# Altium PCB CartePuissance.PcbDoc
Units mm, origin at the board's own origin, x right, y up, seen from the top; angles counter-clockwise.
Board outline 48.93 x 45.85 mm, 2 copper layers (Top Layer, Bottom Layer); 22 components, 10 nets, 48 pads, 0 vias.
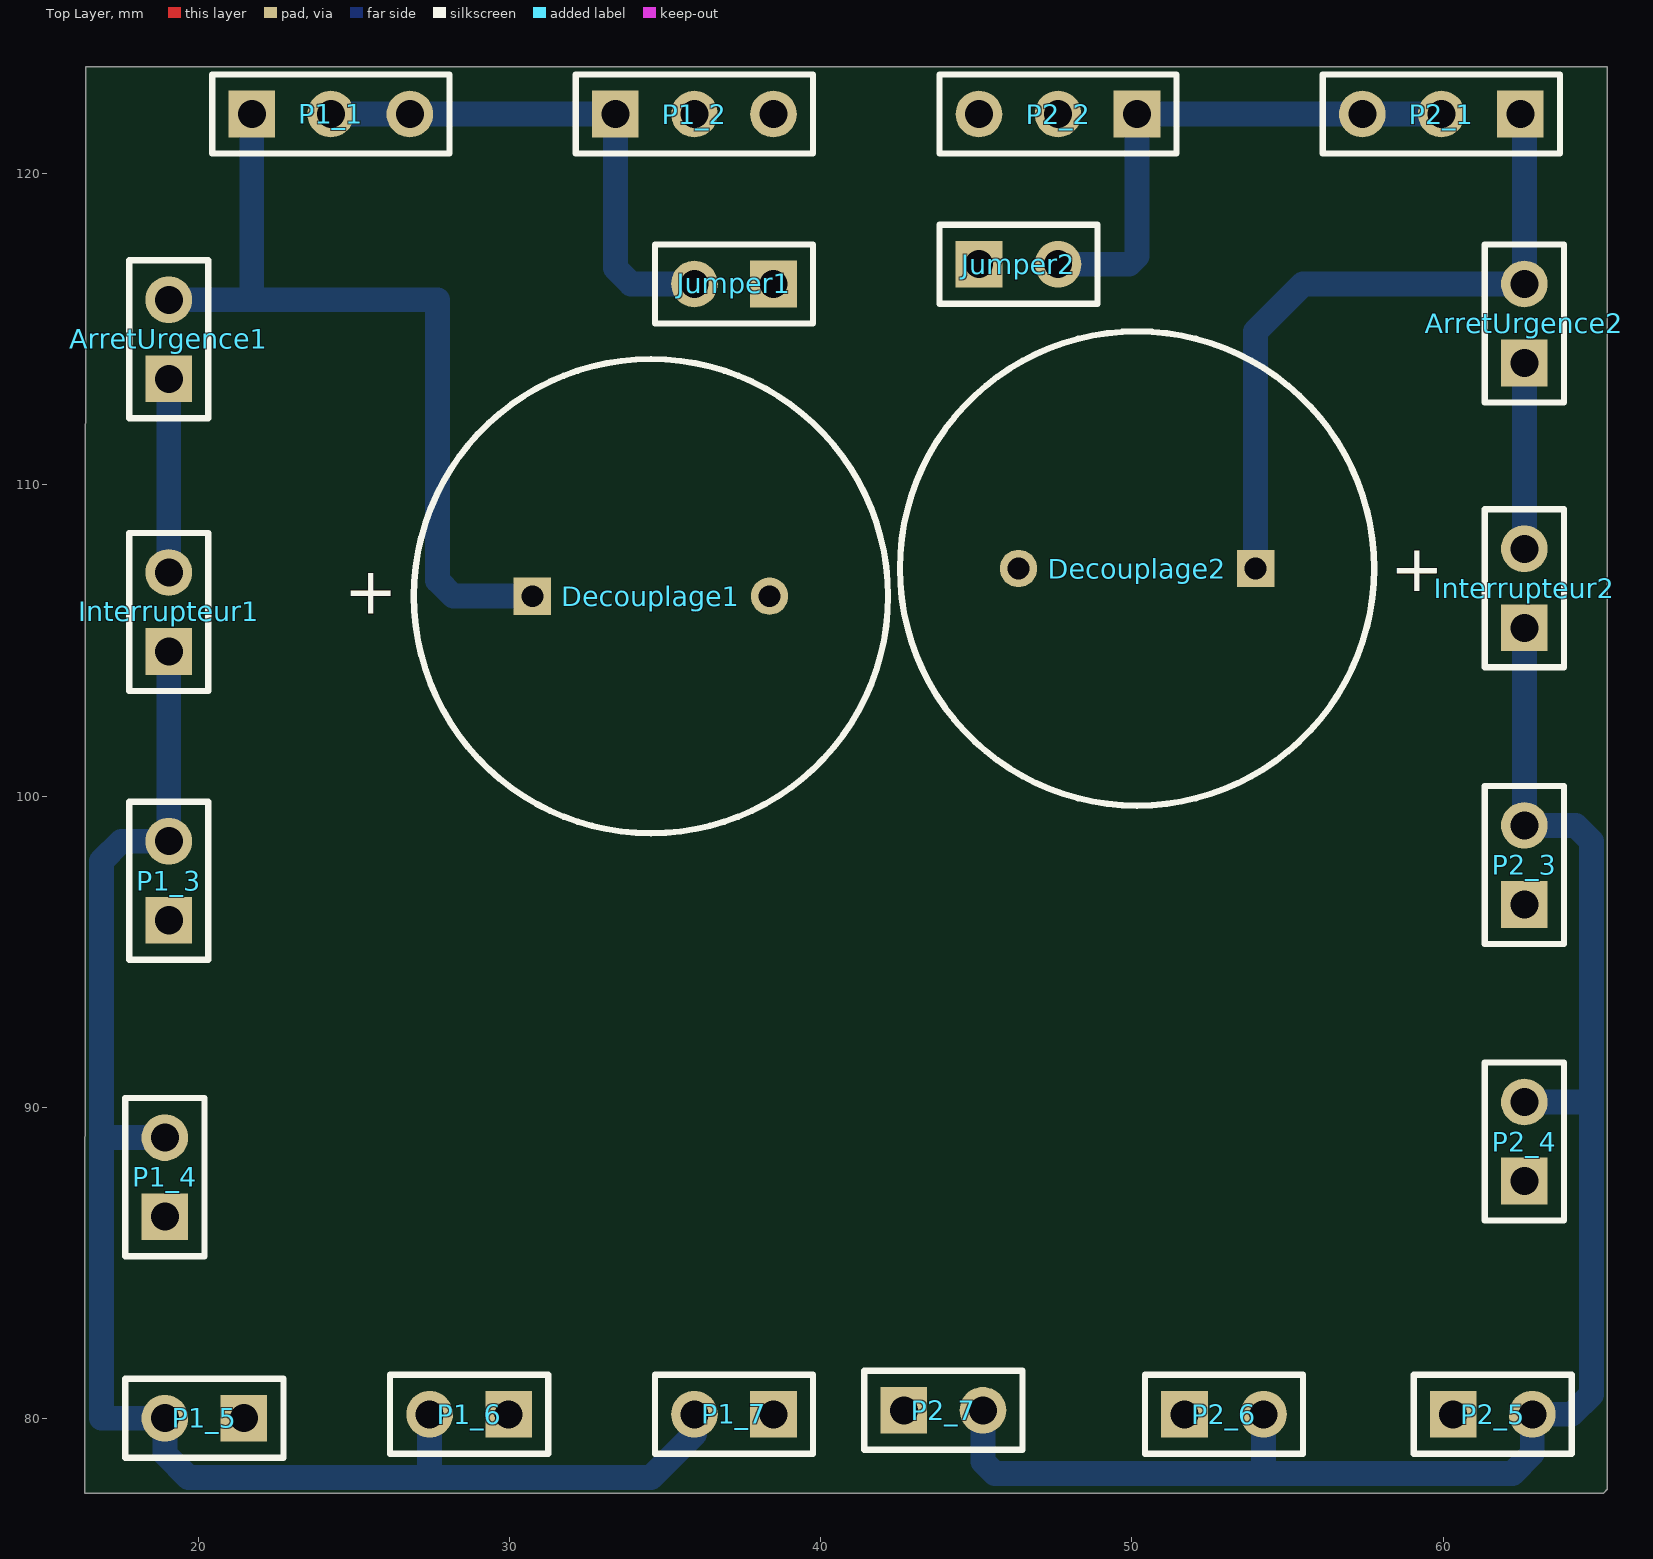
[diagram p0: Top Layer view]
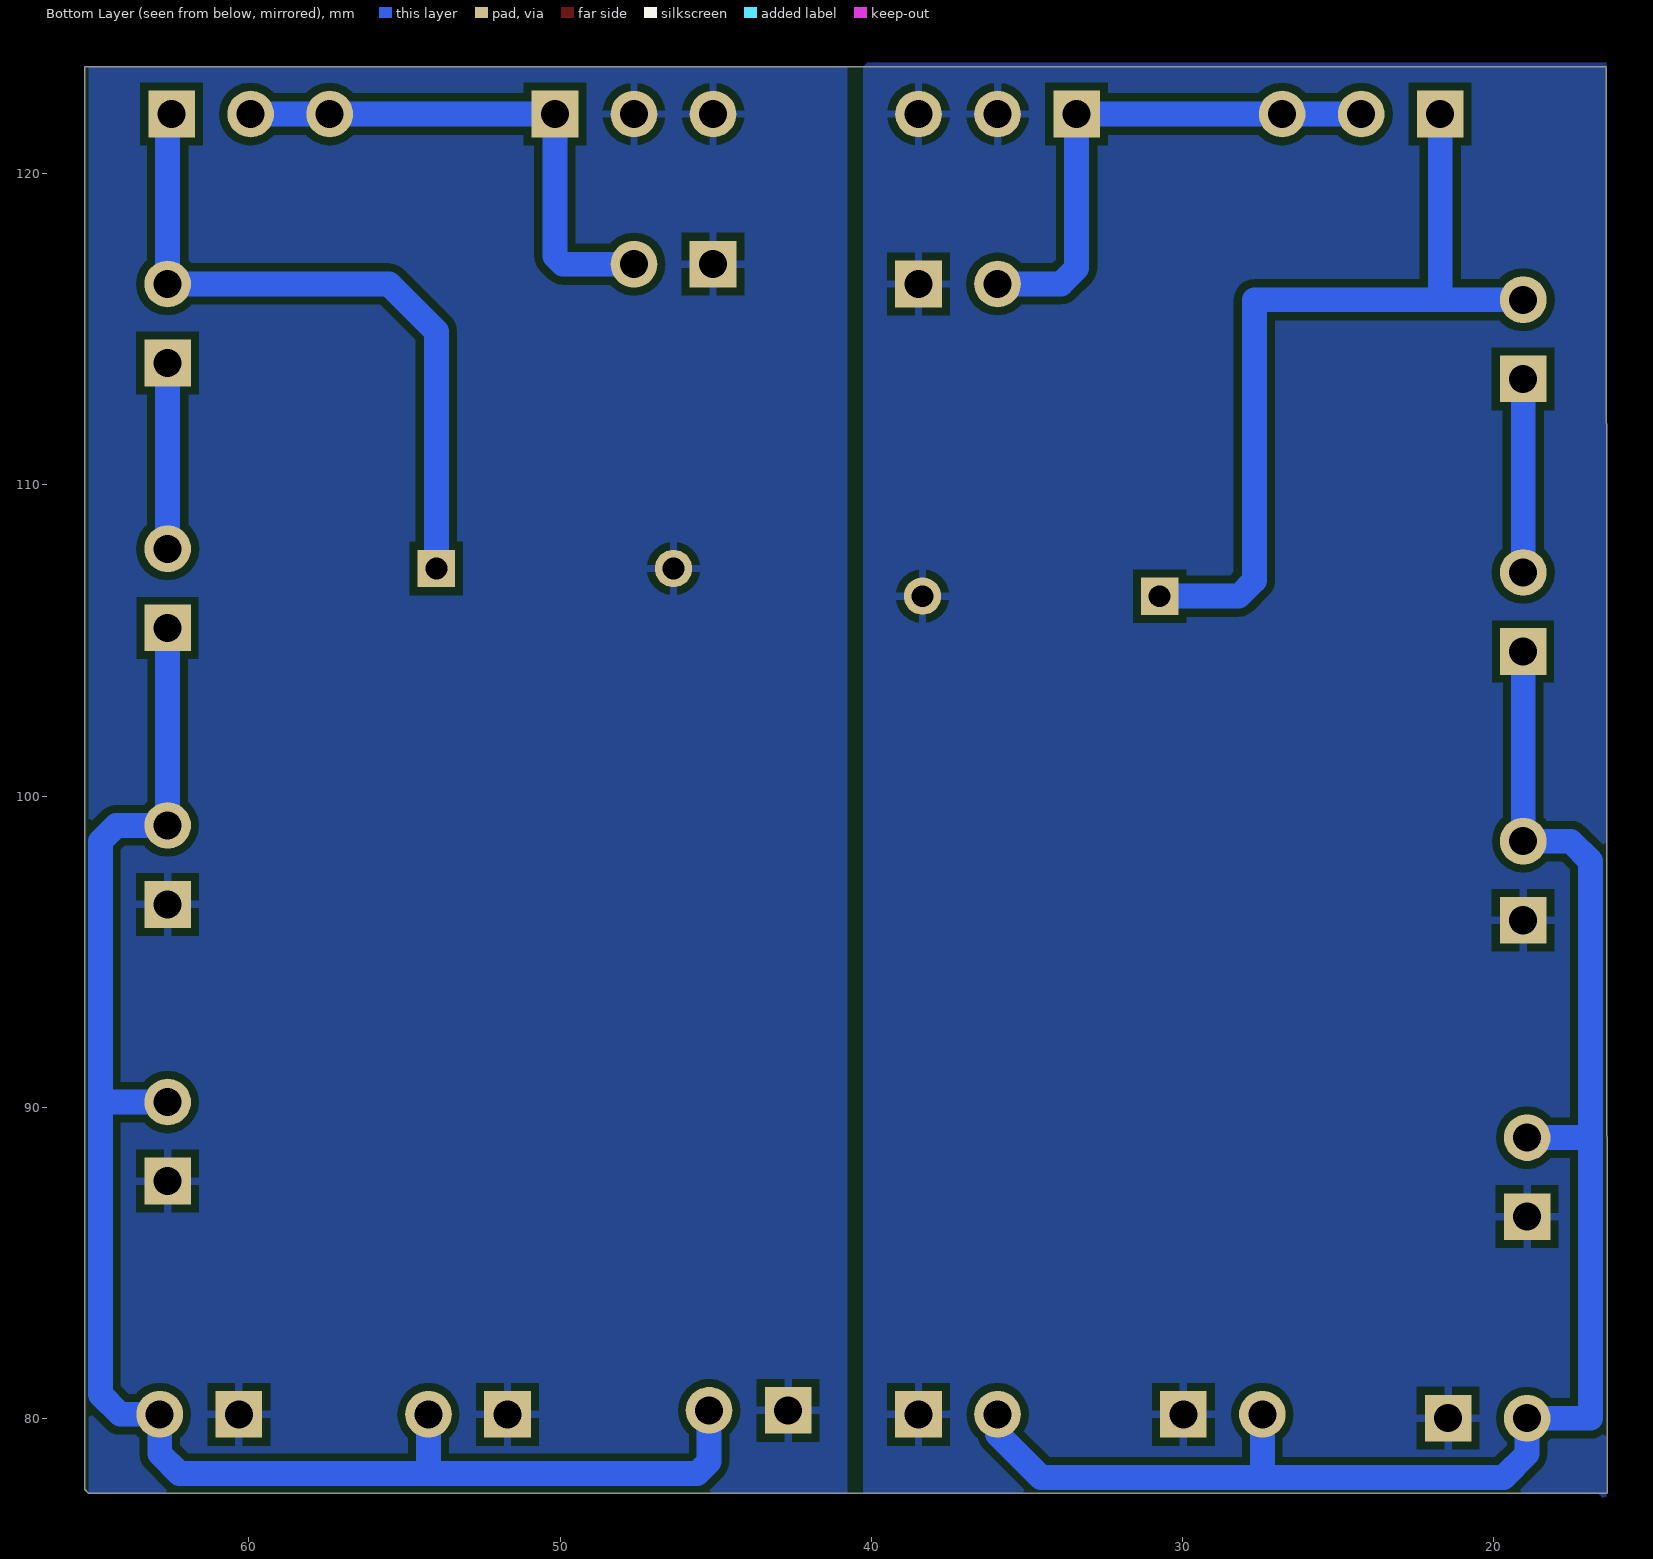
[diagram p1: Bottom Layer view, seen from below]

## Layer stack, top to bottom
Top Layer: signal copper 0.0356
Dielectric: dielectric 0.32, FR-4, Dk 4.8
Bottom Layer: signal copper 0.0356

## Board outline
16.383,123.444 65.278,123.444 65.278,77.724 65.151,77.597 16.346,77.597

## Design rules (kind name [scope] priority, off if disabled: settings)
Clearance [All] p1: gap=0.254
PolygonConnect [All] p1: connectstyle=Relief reliefconductorwidth=0.254 reliefentries=4 polygonreliefangle="90 Angle"
RoomDefinition CartePuissance [InComponentClass('CartePuissance')] p1: confinementstyle=ConfineIn formatcopy=TRUE lockcomponents=FALSE outline 178.943,26.924 407.924,26.924 407.924,45.72 178.943,45.72
RoutingVias [All] p1: holewidth=0.711 width=1.27 viastyle="Through Hole" minholewidth=0.711 minwidth=1.27 maxholewidth=0.711 maxwidth=1.27
SilkscreenOverComponentPads [All] p1: minsilkscreentomaskgap=0.254
SolderMaskExpansion [All] p1: expansion=0.102
Width [All] p1: maxlimit=1 minlimit=0.254 preferedwidth=0.8
27 further rules are at their usual default settings.

## Components (designator, comment, footprint, x,y, rotation, side; value= is the part's Value field where it differs from the comment)
ArretUrgence1 "Header 2" HDR1X2 19.05,113.411 r90 top
ArretUrgence2 "Header 2" HDR1X2 62.611,113.919 r90 top
Decouplage1 "Cap Pol1" RB7.6-15 34.544,106.426 r180 top
Decouplage2 "Cap Pol1" RB7.6-15 50.165,107.315 r0 top
Interrupteur1 "Header 2" HDR1X2 19.05,104.648 r90 top
Interrupteur2 "Header 2" HDR1X2 62.611,105.41 r90 top
Jumper1 "Header 2" HDR1X2 38.481,116.459 r180 top
Jumper2 "Header 2" HDR1X2 45.085,117.094 r0 top
P1_1 "Header 3" HDR1X3 21.717,121.92 r0 top
P1_2 "Header 3" HDR1X3 33.401,121.92 r0 top
P1_3 "Header 2" HDR1X2 19.05,96.012 r90 top
P1_4 "Header 2" HDR1X2 18.923,86.487 r90 top
P1_5 "Header 2" HDR1X2 21.463,80.01 r180 top
P1_6 "Header 2" HDR1X2 29.972,80.137 r180 top
P1_7 "Header 2" HDR1X2 38.481,80.137 r180 top
P2_1 "Header 3" HDR1X3 62.484,121.92 r180 top
P2_2 "Header 3" HDR1X3 50.165,121.92 r180 top
P2_3 "Header 2" HDR1X2 62.611,96.52 r90 top
P2_4 "Header 2" HDR1X2 62.611,87.63 r90 top
P2_5 "Header 2" HDR1X2 60.325,80.137 r0 top
P2_6 "Header 2" HDR1X2 51.689,80.137 r0 top
P2_7 "Header 2" HDR1X2 42.672,80.264 r0 top

## Footprints (in the part's own frame and the unit in brackets; to place one, negate y for a bottom-side part, rotate by r counter-clockwise, add the part's x,y. Pads: shape width x height; smd on the part's side, far side on the other; paste and mask are expansions set on the pad)
HDR1X2 [mm] "Connector; Header; 2 Position"
  rect 1.5x1.5 hole 0.9: 1(0,0)
  round 1.5 hole 0.9: 2(2.54,0)
  silkscreen extent -1.27,-1.27 3.81,1.27
HDR1X3 [mm] "Connector; Header; 3 Position"
  rect 1.5x1.5 hole 0.9: 1(0,0)
  round 1.5 hole 0.9: 2(2.54,0) 3(5.08,0)
  silkscreen extent -1.27,-1.27 6.35,1.27
RB7.6-15 [mm] "Polarized Capacitor (Radial); 2 Leads"
  rect 1.2x1.2 hole 0.7: 1(3.81,0)
  round 1.2 hole 0.7: 2(-3.81,0)
  silkscreen extent -7.62,-7.62 7.62,7.62

## Part data
ArretUrgence1 ArretUrgence2 Interrupteur1 Interrupteur2 Jumper1 Jumper2 P1_3 P1_4 P1_5 P1_6 P1_7 P2_3 P2_4 P2_5 P2_6 P2_7: "Header, 2-Pin"
Decouplage1 Decouplage2: "Polarized Capacitor (Radial)"
P1_1 P1_2 P2_1 P2_2: "Header, 3-Pin"

## Nets (pads, with @x,y where several pads share a name; then routed paths per layer and width w, separated by ;. In a path a pad name is that pad's centre, name@x,y a point inside that pad or via, vN(x,y) a via of type N, cw(c..) or ccw(c..) an arc to the next point about the centre after c; other vN are vias at no path point)
GND1: Decouplage1.2 Jumper1.1 P1_2.2 P1_2.3 P1_3.1 P1_4.1 P1_5.1 P1_6.1 P1_7.1 | length 0.4
  Bottom Layer w0.8: P1_6.1@29.718,80.391 P1_6.1
GND2: Decouplage2.2 Jumper2.1 P2_2.2 P2_2.3 P2_3.1 P2_4.1 P2_5.1 P2_6.1 P2_7.1
NetArretUrgence1_1: ArretUrgence1.1 Interrupteur1.2 | length 6.2
  Bottom Layer w0.8: Interrupteur1.2 ArretUrgence1.1
NetArretUrgence2_1: ArretUrgence2.1 Interrupteur2.2 | length 6
  Bottom Layer w0.8: Interrupteur2.2 ArretUrgence2.1
NetInterrupteur1_1: Interrupteur1.1 P1_3.2 P1_4.2 P1_5.2 P1_6.2 P1_7.2 | length 52.1
  Bottom Layer w0.8: 17.018,89.027 P1_4.2 ; Interrupteur1.1 P1_3.2 17.526,98.552 16.891,97.917 16.891,80.01 P1_5.2 18.923,78.867 19.685,78.105 27.432,78.105 ; P1_6.2 27.432,78.105 ; P1_7.2 35.941,79.502 34.544,78.105 27.432,78.105
NetInterrupteur2_1: Interrupteur2.1 P2_3.2 P2_4.2 P2_5.2 P2_6.2 P2_7.2 | length 53.7
  Bottom Layer w0.8: P2_7.2 45.212,78.613 45.593,78.232 54.229,78.232 ; P2_6.2 54.229,78.232 ; P2_4.2 64.77,90.17 ; Interrupteur2.1 P2_3.2 64.262,99.06 64.77,98.552 64.77,90.17 ; 54.229,78.232 62.23,78.232 62.865,78.867 P2_5.2 64.135,80.137 64.77,80.772 64.77,90.17
NetJumper1_2: Jumper1.2 P1_1.2 P1_1.3 P1_2.1 | length 16.8
  Bottom Layer w0.8: P1_1.2 P1_1.3 P1_2.1 33.401,116.967 33.909,116.459 Jumper1.2
NetJumper2_2: Jumper2.2 P2_1.2 P2_1.3 P2_2.1 | length 17
  Bottom Layer w0.8: Jumper2.2 49.911,117.094 50.165,117.348 P2_2.1 P2_1.3 P2_1.2
VCC1: ArretUrgence1.2 Decouplage1.1 P1_1.1 | length 26.8
  Bottom Layer w0.8: ArretUrgence1.2 27.686,115.951 27.686,106.934 28.194,106.426 Decouplage1.1 ; 21.717,116.078 P1_1.1
VCC2: ArretUrgence2.2 Decouplage2.1 P2_1.1 | length 22.2
  Bottom Layer w0.8: Decouplage2.1 53.975,114.935 55.499,116.459 ArretUrgence2.2 P2_1.1@62.611,121.793

## Polygon pours and split planes (outlines as drawn)
GND1 on Bottom Layer "Bottom Layer-No Net" (solid, pour order 4): 16.383,123.571 40.132,123.571 40.259,123.444 40.259,77.597 16.637,77.597 16.383,77.343
GND2 on Bottom Layer "Bottom Layer-No Net" (solid, pour order 6): 40.767,77.597 40.767,123.444 65.151,123.444 65.151,77.597

## Text inside footprints (layer, text, board x,y; h text height)
Decouplage1: Top Overlay "+" at 26.412,107.163 h1.5 r180
Decouplage2: Top Overlay "+" at 58.297,106.578 h1.5